# Altium PCB PCB.PcbDoc (part 6 of 11)
Units mm, origin at the board's own origin, x right, y up, seen from the top; angles counter-clockwise.
Board outline 100.46 x 70.51 mm, 10 copper layers (L1(SIG), L2(GND), L3(PWR), L4(SIG), L5(GND), L6(SIG), L7(GND), L8(SIG), L9(GND), L10(SIG)), stack 1.49 mm thick; 425 components, 324 nets, 2004 pads, 1425 vias.
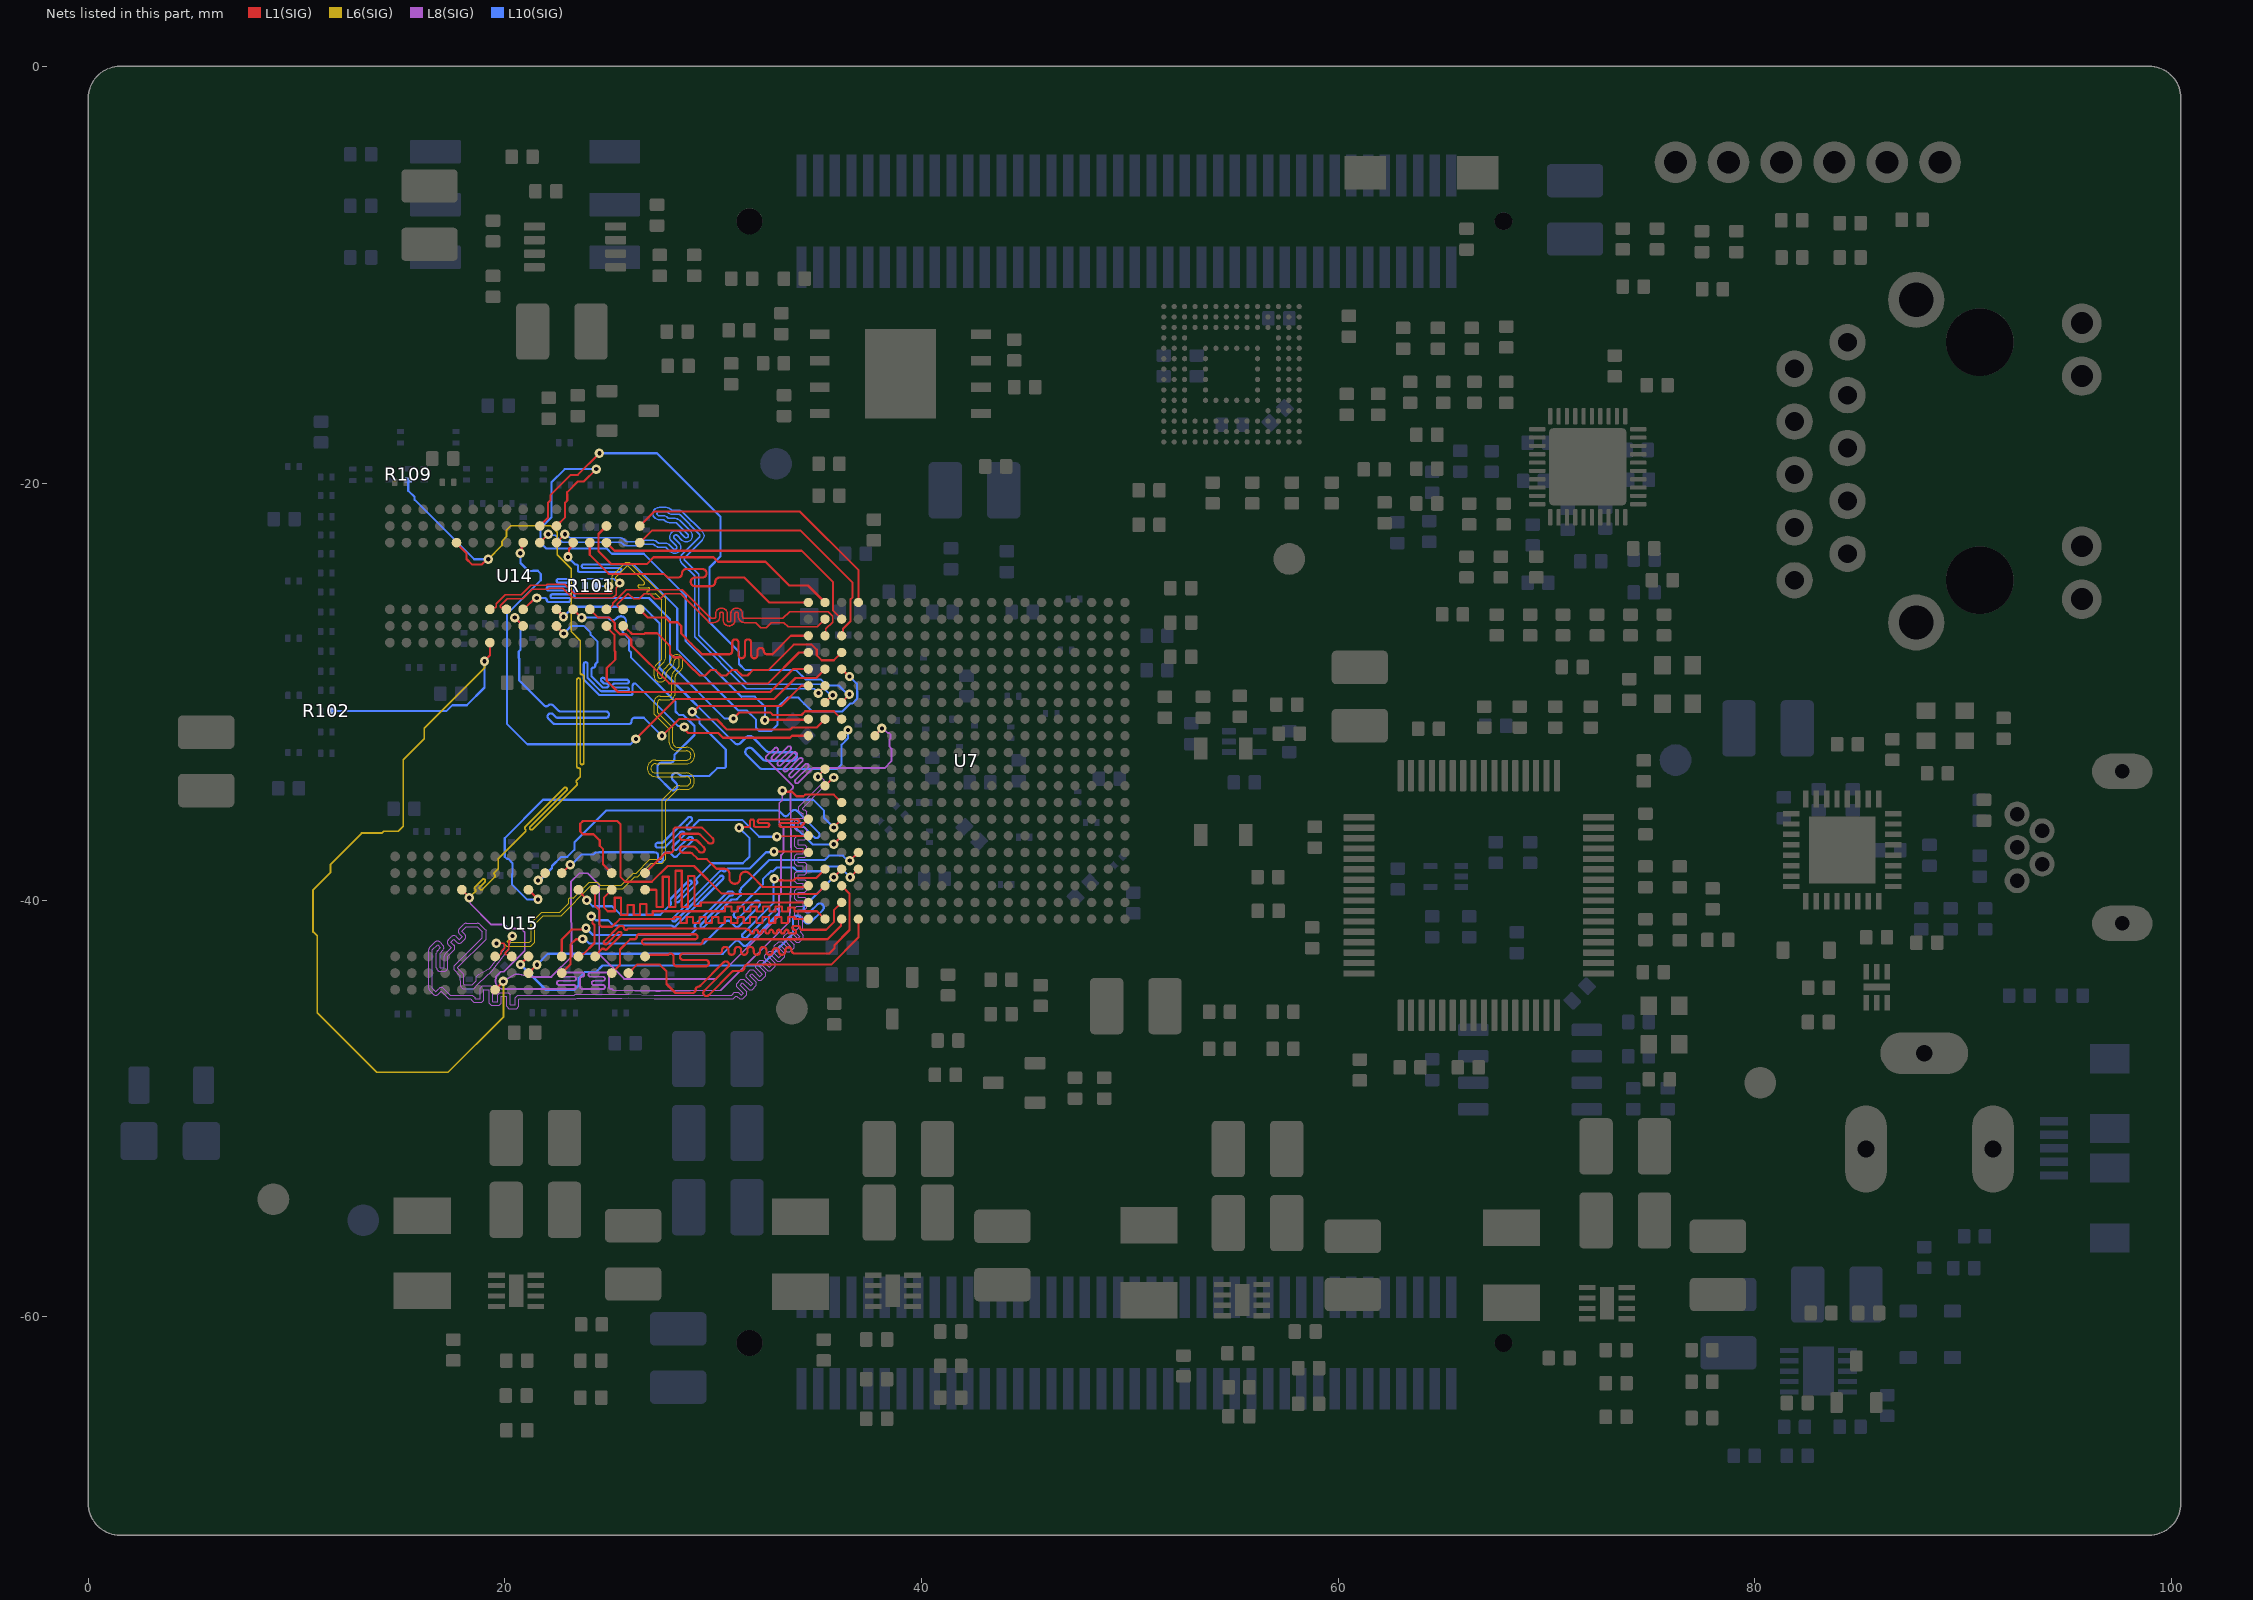
[diagram p13: the nets of this part, all layers, seen from the top]

## Via types
v1: diameter 0.45, hole 0.2, L1(SIG) to L10(SIG), tented both sides, 1194 vias
v2: diameter 0.45, hole 0.2, L1(SIG) to L10(SIG), 211 vias
v3: diameter 0.6, hole 0.25, L1(SIG) to L10(SIG), 9 vias
v4: diameter 0, hole 0.2, L1(SIG) to L10(SIG), tented both sides, 6 vias
v5: diameter 5, hole 3.2, L1(SIG) to L10(SIG), tented both sides, 4 vias
v6: diameter 0.45/0.45/0.45/0.45/0.45/0.45/0.45/0.45/0.45/0.45 (per signal layer), hole 0.2, L1(SIG) to L10(SIG), tented both sides, 1 vias

## Nets (pads, with @x,y where several pads share a name; then routed paths per layer and width w, separated by ;. In a path a pad name is that pad's centre, name@x,y a point inside that pad or via, vN(x,y) a via of type N, cw(c..) or ccw(c..) an arc to the next point about the centre after c; other vN are vias at no path point) (continued)
DDR_BA2: R109.1 U7.J5 U14.M3 U15.M3 | length 106.5
  L1(SIG) w0.103: U14.M3@17.679,-22.839 17.679,-22.873 18.16,-23.354 18.16,-23.625 18.415,-23.88 18.905,-23.88 19.147,-23.637 v1(19.2,-23.637) ; U15.M3@17.933,-39.501 17.933,-39.514 18.288,-39.869 v1(18.288,-39.882) ; U7.J5@37.77,-32.11 37.77,-32.098 38.101,-31.767 v1(38.101,-31.755)
  L6(SIG) w0.088: v1(18.288,-39.882) 18.542,-39.628 18.573,-39.597 ccw(c18.514,-39.537) 18.573,-39.478 cw(c18.632,-39.419) 18.573,-39.36 18.92,-39.013 cw(c18.979,-39.072) 19.038,-39.013 cw(c18.979,-39.072) 19.038,-39.131 18.81,-39.36 ccw(c18.869,-39.419) 18.81,-39.478 ccw(c18.869,-39.419) 18.928,-39.478 19.504,-38.903 ccw(c19.445,-38.844) 19.504,-38.784 cw(c19.563,-38.725) 19.504,-38.666 19.535,-38.635 19.681,-38.488 19.681,-38.015 20.949,-36.748 20.98,-36.717 ccw(c20.92,-36.657) 20.98,-36.598 cw(c21.039,-36.539) 20.979,-36.48 22.846,-34.613 cw(c22.905,-34.672) 22.965,-34.613 cw(c22.905,-34.672) 22.965,-34.732 21.217,-36.48 ccw(c21.276,-36.539) 21.217,-36.598 ccw(c21.276,-36.539) 21.335,-36.598 23.452,-34.482 ccw(c23.392,-34.423) 23.451,-34.363 cw(c23.511,-34.304) 23.451,-34.245 23.482,-34.214 23.622,-34.074 23.622,-33.786 23.622,-33.742 ccw(c23.538,-33.742) 23.538,-33.658 cw(c23.538,-33.574) 23.454,-33.574 23.454,-29.426 cw(c23.538,-29.426) 23.538,-29.342 cw(c23.538,-29.426) 23.622,-29.426 23.622,-33.407 ccw(c23.706,-33.407) 23.706,-33.49 ccw(c23.706,-33.407) 23.79,-33.407 23.79,-29.259 ccw(c23.706,-29.259) 23.706,-29.175 cw(c23.706,-29.091) 23.622,-29.091 23.622,-29.047 23.622,-27.537 23.211,-27.127 23.185,-27.101 23.185,-27.028 23.187,-26.393 ; v1(19.2,-23.637) 19.864,-22.973 19.864,-22.767 20.077,-22.554 20.077,-22.242 20.293,-22.026 22.196,-22.026 22.514,-22.344 22.514,-23.42 23.185,-24.092 23.187,-26.392
  L8(SIG) w0.088: v1(18.288,-39.882) 18.337,-39.93 18.337,-40.162 19.352,-41.177 19.994,-41.177 20.174,-41.357 20.788,-41.366 20.813,-41.391 20.955,-41.533 20.955,-42.432 19.947,-43.44 19.81,-43.44 19.595,-43.655 19.572,-43.678 19.569,-43.71 19.557,-43.872 ccw(c19.925,-43.901) 19.925,-44.27 22.352,-44.27 23.317,-44.27 ccw(c23.317,-44.171) 23.417,-44.171 ccw(c23.317,-44.171) 23.317,-44.071 22.596,-44.071 cw(c22.596,-43.972) 22.497,-43.972 cw(c22.596,-43.972) 22.596,-43.873 23.317,-43.873 ccw(c23.317,-43.774) 23.317,-43.675 22.812,-43.675 cw(c22.812,-43.576) 22.812,-43.477 23.714,-43.477 cw(c23.714,-43.576) 23.714,-43.675 ccw(c23.714,-43.774) 23.615,-43.774 23.615,-44.171 ccw(c23.714,-44.171) 23.714,-44.27 24.705,-44.27 ccw(c24.705,-44.171) 24.705,-44.071 24.27,-44.071 cw(c24.27,-43.972) 24.27,-43.873 24.705,-43.873 ccw(c24.705,-43.774) 24.705,-43.675 24.115,-43.675 cw(c24.115,-43.576) 24.016,-43.576 cw(c24.115,-43.576) 24.115,-43.477 24.904,-43.477 cw(c24.904,-43.576) 25.003,-43.576 25.003,-44.171 ccw(c25.102,-44.171) 25.102,-44.27 25.146,-44.27 25.204,-44.328 27.242,-44.354 27.444,-44.354 30.364,-44.328 33.643,-41.049 33.667,-41.025 33.75,-38.716 33.75,-38.399 33.719,-34.811 33.719,-34.738 33.782,-34.675 33.813,-34.643 ccw(c33.743,-34.573) 33.813,-34.503 32.551,-33.241 cw(c32.622,-33.171) 32.551,-33.101 32.947,-32.705 cw(c33.018,-32.775) 33.088,-32.705 cw(c33.018,-32.775) 33.088,-32.845 32.832,-33.101 ccw(c32.902,-33.171) 32.803,-33.171 ccw(c32.902,-33.171) 32.972,-33.242 33.575,-32.638 cw(c33.645,-32.708) 33.715,-32.638 cw(c33.645,-32.708) 33.715,-32.779 33.112,-33.382 ccw(c33.182,-33.452) 33.112,-33.522 ccw(c33.182,-33.452) 33.252,-33.522 33.856,-32.919 cw(c33.926,-32.989) 34.025,-32.989 cw(c33.926,-32.989) 33.996,-33.059 33.392,-33.662 ccw(c33.463,-33.732) 33.463,-33.831 ccw(c33.463,-33.732) 33.533,-33.802 34.136,-33.199 cw(c34.206,-33.269) 34.277,-33.339 33.673,-33.942 ccw(c33.743,-34.013) 33.644,-34.013 ccw(c33.743,-34.013) 33.813,-34.083 34.416,-33.48 cw(c34.486,-33.55) 34.486,-33.451 cw(c34.486,-33.55) 34.556,-33.62 33.953,-34.223 ccw(c34.023,-34.293) 34.093,-34.364 34.767,-33.69 34.798,-33.659 38.227,-33.659 38.558,-33.328 38.558,-32.724 38.469,-32.635 38.469,-32.276 38.52,-32.225 38.52,-32.049 38.448,-31.977 38.385,-31.977 38.163,-31.755 v1(38.101,-31.755)
  L10(SIG) w0.103: R109.1@15.367,-19.837 15.364,-19.84 15.364,-20.345 15.668,-20.65 15.668,-20.777 18.529,-23.637 v1(19.2,-23.637)
DDR_CK_N: R101.1 U7.M2 U14.K7 U15.K7 | length 103.5
  L1(SIG) w0.069: U14.K7@19.279,-26.039 19.356,-25.962 19.539,-25.962 19.581,-25.92 19.581,-25.782 20.023,-25.34 20.78,-25.34 21.246,-24.874 21.993,-24.874 22.043,-24.823 22.864,-24.823 23.338,-25.297 25.106,-25.297 25.147,-25.256 25.147,-25.17 24.983,-25.006 v1(24.983,-24.939) ; U15.K7@19.533,-42.701 19.61,-42.624 19.793,-42.624 19.835,-42.582 19.835,-42.444 19.996,-42.283 19.996,-42.132 19.939,-42.075 v1(19.592,-42.075) ; U7.M2@35.381,-34.51 U7.M2@35.37,-34.51 U7.M2@35.381,-34.51 ; U7.M2@35.381,-34.51 v1@35.777,-34.114 ; U7.M2@35.381,-34.51 v1@35.777,-34.114 ; v1@35.777,-34.114 v1(35.788,-34.114) v1@35.777,-34.114
  L6(SIG) w0.046: v1(19.592,-42.075) 19.953,-42.075 20.08,-42.202 21.246,-42.202 21.431,-42.017 21.431,-41.154 21.84,-40.746 22.702,-40.746 24.132,-39.316 24.373,-39.316 24.508,-39.45 25.66,-39.45 26.241,-38.87 26.389,-38.87 27.039,-38.219 27.561,-38.219 27.732,-38.048 27.732,-37.437 ; v1(24.983,-24.939) 24.983,-24.906 25.155,-24.734 25.155,-24.421 25.8,-23.776 25.981,-23.776 27.714,-25.509 27.714,-27.563 27.714,-28.378 cw(c27.419,-28.378) 27.628,-28.587 27.374,-28.84 ccw(c27.461,-28.927) 27.338,-28.927 27.338,-29.231 ccw(c27.461,-29.231) 27.461,-29.354 ccw(c27.461,-29.231) 27.584,-29.231 27.584,-29.1 cw(c27.879,-29.1) 27.67,-28.892 27.924,-28.638 ccw(c27.837,-28.551) 27.96,-28.551 27.96,-28.518 cw(c28.255,-28.518) 28.255,-28.223 cw(c28.255,-28.518) 28.551,-28.518 28.551,-28.724 cw(c28.255,-28.724) 28.465,-28.933 28.211,-29.187 ccw(c28.298,-29.274) 28.175,-29.274 28.175,-30.083 cw(c27.879,-30.083) 27.879,-30.378 27.461,-30.378 ccw(c27.461,-30.501) 27.338,-30.501 27.338,-30.61 27.338,-31.009 27.573,-31.244 28.061,-31.731 28.061,-32.435 ccw(c28.283,-32.435) 28.283,-32.658 28.715,-32.658 cw(c28.715,-33.054) 29.111,-33.054 cw(c28.715,-33.054) 28.715,-33.449 27.234,-33.449 ccw(c27.234,-33.672) 27.011,-33.672 ccw(c27.234,-33.672) 27.234,-33.895 28.705,-33.895 cw(c28.705,-34.29) 29.101,-34.29 cw(c28.705,-34.29) 28.705,-34.686 28.386,-34.686 ccw(c28.386,-34.909) 28.229,-34.751 27.732,-35.248 27.732,-37.437 ; 27.732,-36.961 27.732,-37.437
  L8(SIG) w0.047: v1(19.592,-42.075) 19.872,-42.075 19.952,-42.075 19.979,-42.102 19.979,-42.326 19.313,-43.225 19.293,-43.248 cw(c19.125,-43.101) 19.23,-43.297 18.751,-43.554 18.747,-43.559 18.622,-43.683 18.622,-43.874 18.424,-44.073 18.061,-44.073 18.034,-44.045 18.034,-43.565 17.983,-43.514 17.736,-43.266 17.736,-43.228 19.097,-41.867 19.097,-41.452 19.015,-41.371 18.963,-41.318 18.936,-41.291 18.8,-41.155 ccw(c18.678,-41.279) 18.678,-41.105 18.152,-41.105 ccw(c18.152,-41.279) 18.03,-41.156 17.814,-41.372 ccw(c17.937,-41.494) 17.814,-41.616 17.953,-41.756 17.814,-41.895 17.676,-41.757 ccw(c17.552,-41.879) 17.43,-41.756 17.29,-41.895 ccw(c17.413,-42.018) 17.29,-42.14 17.43,-42.279 17.138,-42.571 ccw(c17.261,-42.693) 17.088,-42.693 17.088,-43.239 16.891,-43.239 16.891,-42.54 17.054,-42.377 17.054,-42.37 ccw(c16.906,-42.279) 17.029,-42.157 16.89,-42.018 ccw(c16.767,-42.14) 16.644,-42.018 16.398,-42.264 ccw(c16.521,-42.387) 16.347,-42.387 16.347,-44.226 ccw(c16.521,-44.226) 16.398,-44.348 16.561,-44.511 ccw(c16.683,-44.388) 16.805,-44.511 16.944,-44.372 17.022,-44.449 17.307,-44.734 18.164,-44.734 18.372,-44.734 18.399,-44.761 18.399,-44.802 18.501,-44.904 18.892,-44.904 18.993,-44.802 18.993,-44.29 19.24,-44.29 19.24,-44.945 19.341,-45.047 19.732,-45.047 19.833,-44.945 19.833,-44.611 20.08,-44.611 20.08,-45.101 20.182,-45.203 20.572,-45.203 20.674,-45.101 20.674,-44.761 20.701,-44.734 20.775,-44.734 21.035,-44.734 23.413,-44.733 23.447,-44.699 25.603,-44.699 ccw(c25.603,-44.479) 25.607,-44.699 25.94,-44.694 cw(c25.943,-44.917) 25.952,-44.694 27.166,-44.741 ccw(c27.172,-44.568) 27.172,-44.741 27.585,-44.741 27.593,-44.734 30.961,-44.734 31.033,-44.663 31.092,-44.604 31.13,-44.604 31.271,-44.745 31.415,-44.745 31.62,-44.54 31.62,-44.396 31.303,-44.079 31.407,-43.975 31.724,-44.292 31.867,-44.292 32.073,-44.087 32.073,-43.943 31.756,-43.626 31.86,-43.523 32.176,-43.839 32.32,-43.839 32.525,-43.634 32.525,-43.49 32.209,-43.173 32.312,-43.07 32.629,-43.387 32.773,-43.387 32.978,-43.181 32.978,-43.038 32.661,-42.721 32.765,-42.617 33.082,-42.934 33.226,-42.934 33.431,-42.729 33.431,-42.585 33.114,-42.268 33.218,-42.164 33.535,-42.481 33.678,-42.481 33.884,-42.276 33.884,-42.132 33.567,-41.815 33.67,-41.712 33.987,-42.028 34.131,-42.028 34.336,-41.823 34.336,-41.679 34.196,-41.539 34.196,-41.5 34.248,-41.448 34.29,-41.406 34.29,-41.281 34.29,-40.831 34.161,-40.702 34.096,-40.702 34.096,-40.455 34.402,-40.455 34.504,-40.354 34.504,-39.963 34.402,-39.862 34.096,-39.862 34.096,-39.615 34.402,-39.615 34.504,-39.513 34.504,-39.123 34.402,-39.021 34.096,-39.021 34.096,-38.775 34.402,-38.775 34.504,-38.673 34.504,-38.283 34.402,-38.181 34.096,-38.181 34.096,-37.934 34.402,-37.934 34.504,-37.833 34.504,-37.442 34.402,-37.341 34.096,-37.341 34.096,-37.094 34.402,-37.094 34.504,-36.993 34.504,-36.602 34.402,-36.501 34.096,-36.501 34.096,-36.254 34.402,-36.254 34.504,-36.152 34.504,-35.762 34.402,-35.66 34.317,-35.66 34.29,-35.633 34.29,-35.582 35.264,-34.608 35.572,-34.3 ; 35.572,-34.3 35.758,-34.114 v1(35.788,-34.114) 35.755,-34.114 35.572,-34.297 35.572,-34.3
  L10(SIG) w0.069: R101.1@24.511,-25.023 24.511,-24.97 24.551,-24.93 24.974,-24.93 v1(24.983,-24.939)
DDR_CK_P: R101.2 U7.L2 U14.J7 U15.J7 | length 103.3
  L1(SIG) w0.069: U14.J7@20.079,-26.039 20.002,-25.962 19.819,-25.962 19.777,-25.92 19.777,-25.863 20.104,-25.535 20.861,-25.535 21.327,-25.07 22.074,-25.07 22.124,-25.019 22.783,-25.019 23.257,-25.493 25.187,-25.493 25.343,-25.337 25.343,-25.005 25.508,-24.84 v1(25.508,-24.774) ; U15.J7@20.333,-42.701 20.256,-42.624 20.073,-42.624 20.031,-42.582 20.031,-42.525 20.192,-42.364 20.192,-42.001 20.36,-41.832 v1(20.36,-41.729) ; v1(35.027,-34.074) 35.027,-34.063 35.37,-33.72 U7.L2@35.37,-33.71
  L6(SIG) w0.046: v1(20.36,-41.729) 20.124,-41.965 20.124,-42.003 20.151,-42.029 21.174,-42.029 21.259,-41.945 21.259,-41.083 21.768,-40.573 22.63,-40.573 22.991,-40.213 23.063,-40.141 23.063,-39.929 23.114,-39.878 23.264,-39.878 23.295,-39.909 24.061,-39.143 24.445,-39.143 24.579,-39.277 25.589,-39.277 26.169,-38.697 26.317,-38.697 26.968,-38.046 27.49,-38.046 27.559,-37.977 27.559,-37.437 27.559,-35.177 28.107,-34.629 cw(c28.386,-34.909) 28.386,-34.513 28.705,-34.513 ccw(c28.705,-34.29) 28.928,-34.29 ccw(c28.705,-34.29) 28.705,-34.067 27.234,-34.067 cw(c27.234,-33.672) 26.838,-33.672 cw(c27.234,-33.672) 27.234,-33.276 28.715,-33.276 ccw(c28.715,-33.054) 28.938,-33.054 ccw(c28.715,-33.054) 28.715,-32.831 28.283,-32.831 cw(c28.283,-32.435) 27.888,-32.435 27.888,-31.803 27.329,-31.244 27.165,-31.08 27.165,-30.61 27.165,-30.501 cw(c27.461,-30.501) 27.461,-30.205 27.879,-30.205 ccw(c27.879,-30.083) 28.002,-30.083 28.002,-29.274 cw(c28.298,-29.274) 28.089,-29.065 28.342,-28.811 ccw(c28.255,-28.724) 28.378,-28.724 28.378,-28.518 ccw(c28.255,-28.518) 28.255,-28.395 ccw(c28.255,-28.518) 28.133,-28.518 28.133,-28.551 cw(c27.837,-28.551) 28.046,-28.76 27.792,-29.014 ccw(c27.879,-29.1) 27.757,-29.1 27.757,-29.231 cw(c27.461,-29.231) 27.461,-29.527 cw(c27.461,-29.231) 27.165,-29.231 27.165,-28.927 cw(c27.461,-28.927) 27.252,-28.718 27.506,-28.464 ccw(c27.419,-28.378) 27.541,-28.378 27.541,-27.563 27.541,-25.782 27.541,-25.581 27.273,-25.313 ccw(c27.222,-25.364) 27.222,-25.291 26.888,-25.291 cw(c26.888,-25.219) 26.815,-25.219 cw(c26.888,-25.219) 26.888,-25.146 ccw(c26.888,-25.073) 26.961,-25.073 ccw(c26.888,-25.073) 26.888,-25 26.463,-25 cw(c26.463,-24.927) 26.39,-24.927 cw(c26.463,-24.927) 26.463,-24.854 26.639,-24.854 ccw(c26.639,-24.781) 26.69,-24.73 26.61,-24.649 25.91,-23.949 25.872,-23.949 25.328,-24.493 25.328,-24.577 25.508,-24.757 v1(25.508,-24.774)
  L8(SIG) w0.047: 16.906,-42.28 16.768,-42.418 ccw(c16.891,-42.54) 16.717,-42.54 16.717,-43.239 ccw(c16.891,-43.239) 16.891,-43.412 17.088,-43.412 ccw(c17.088,-43.239) 17.261,-43.239 17.261,-42.693 17.553,-42.402 ccw(c17.43,-42.279) 17.552,-42.156 17.413,-42.018 17.552,-41.879 17.692,-42.018 ccw(c17.814,-41.895) 17.936,-42.018 18.076,-41.878 ccw(c17.953,-41.756) 18.075,-41.633 17.937,-41.494 18.152,-41.279 18.678,-41.279 18.84,-41.441 18.892,-41.493 18.923,-41.524 18.923,-41.795 17.562,-43.156 17.562,-43.338 17.796,-43.572 17.823,-43.599 17.86,-44.117 17.989,-44.246 18.495,-44.246 18.732,-44.01 18.758,-43.983 19.395,-43.391 ccw(c19.125,-43.101) 19.416,-43.37 19.42,-43.366 19.443,-43.34 ccw(c19.133,-43.093) 19.452,-43.328 20.153,-42.383 v1(20.36,-41.729) ; 16.906,-42.279 16.767,-42.14 16.521,-42.387 16.521,-44.226 16.683,-44.388 16.822,-44.248 cw(c16.944,-44.372) 17.067,-44.248 ; 17.067,-44.249 17.145,-44.327 17.379,-44.561 18.164,-44.561 18.444,-44.561 18.573,-44.689 18.573,-44.73 18.82,-44.73 18.82,-44.218 18.921,-44.117 19.312,-44.117 19.413,-44.218 19.413,-44.873 19.66,-44.873 19.66,-44.539 19.762,-44.437 20.152,-44.437 20.254,-44.539 20.254,-45.029 20.5,-45.029 20.5,-44.689 20.629,-44.561 20.775,-44.561 20.963,-44.561 21.033,-44.56 23.341,-44.56 23.375,-44.526 25.603,-44.526 25.935,-44.52 cw(c25.943,-44.917) 25.96,-44.52 27.172,-44.568 27.513,-44.568 27.521,-44.561 30.89,-44.561 30.91,-44.54 31.02,-44.43 31.202,-44.43 31.343,-44.571 31.446,-44.468 31.13,-44.151 31.13,-44.007 31.335,-43.802 31.479,-43.802 31.796,-44.119 31.899,-44.015 31.582,-43.698 31.582,-43.554 31.788,-43.349 31.931,-43.349 32.248,-43.666 32.352,-43.562 32.035,-43.245 32.035,-43.102 32.24,-42.896 32.384,-42.896 32.701,-43.213 32.805,-43.109 32.488,-42.793 32.488,-42.649 32.693,-42.443 32.837,-42.443 33.154,-42.76 33.257,-42.657 32.94,-42.34 32.94,-42.196 33.146,-41.991 33.29,-41.991 33.606,-42.308 33.71,-42.204 33.393,-41.887 33.393,-41.743 33.599,-41.538 33.742,-41.538 34.059,-41.855 34.163,-41.751 34.022,-41.61 34.022,-41.428 34.116,-41.334 34.116,-41.316 34.116,-41.281 34.116,-40.903 34.089,-40.875 34.024,-40.875 33.922,-40.774 33.922,-40.383 34.024,-40.282 34.33,-40.282 34.33,-40.035 34.024,-40.035 33.922,-39.933 33.922,-39.543 34.024,-39.441 34.33,-39.441 34.33,-39.195 34.024,-39.195 33.922,-39.093 33.922,-38.703 34.024,-38.601 34.33,-38.601 34.33,-38.355 34.024,-38.355 33.922,-38.253 33.922,-37.863 34.024,-37.761 34.33,-37.761 34.33,-37.514 34.024,-37.514 33.922,-37.413 33.922,-37.022 34.024,-36.921 34.33,-36.921 34.33,-36.674 34.024,-36.674 33.922,-36.572 33.922,-36.182 34.024,-36.08 34.33,-36.08 34.33,-35.834 34.245,-35.834 34.116,-35.705 34.116,-35.51 35.018,-34.608 35.341,-34.285 35.341,-34.247 35.245,-34.151 35.105,-34.151 v1(35.027,-34.074) v1@35.137,-34.074
  L10(SIG) w0.069: R101.2@23.855,-24.896 23.86,-24.891 23.86,-24.658 23.938,-24.58 25.239,-24.58 25.434,-24.774 v1(25.508,-24.774)
DDR_CKE: R102.1 U7.N3 U14.K9 U15.K9 | length 77.1
  L1(SIG) w0.103: v1(19.02,-28.535) 19.02,-28.515 19.279,-28.256 U14.K9@19.279,-27.639 ; U15.K9@19.533,-44.301 19.533,-44.297 19.925,-43.905 v1(19.925,-43.901) ; v1(33.325,-34.74) 33.38,-34.795 33.782,-34.795 34.002,-35.015 34.332,-35.015 34.414,-34.933 35.793,-34.933 U7.N3@36.17,-35.31
  L6(SIG) w0.088: v1(19.02,-28.535) 19.02,-28.862 16.129,-31.754 16.129,-32.262 15.12,-33.27 15.12,-36.444 14.875,-36.69 14.188,-36.69 14.095,-36.783 13.124,-36.783 11.634,-38.273 11.634,-38.661 10.795,-39.501 10.795,-41.522 10.992,-41.719 10.992,-45.413 13.843,-48.264 17.272,-48.264 19.941,-45.595 19.941,-43.917 v1(19.925,-43.901)
  L8(SIG) w0.088: v1(19.925,-43.901) 20.482,-43.556 20.685,-43.556 21.222,-43.658 21.248,-43.684 21.251,-43.687 22.236,-43.687 23.223,-42.701 23.173,-40.527 23.173,-39.121 23.583,-38.711 23.983,-38.711 24.534,-39.263 24.534,-42.588 25.728,-43.781 30.136,-43.781 33.153,-40.764 33.153,-39.795 33.262,-39.686 33.262,-38.773 ; 33.262,-38.773 33.262,-37.84 33.376,-37.725 33.376,-36.555 33.175,-36.355 33.175,-35.338 33.201,-35.312 33.318,-35.195 v1(33.325,-34.74)
  L10(SIG) w0.103: R102.1@11.708,-30.916 17.205,-30.916 17.479,-30.642 18.171,-30.642 19.02,-29.792 v1(19.02,-28.535)
DDR_DM0: U7.A1 U14.D3 | length 14.5
  L1(SIG) w0.103: U14.D3@24.079,-22.839 24.079,-23.423 24.991,-24.336 27.634,-24.336 27.813,-24.515 28.251,-24.515 28.303,-24.515 ccw(c28.303,-24.308) 28.51,-24.308 cw(c28.716,-24.308) 28.716,-24.101 29.48,-24.101 cw(c29.48,-24.308) 29.687,-24.308 cw(c29.48,-24.308) 29.48,-24.515 29.13,-24.515 ccw(c29.13,-24.721) 28.923,-24.721 ccw(c29.13,-24.721) 29.13,-24.928 29.893,-24.928 ccw(c29.893,-24.721) 30.1,-24.721 cw(c30.307,-24.721) 30.307,-24.515 30.358,-24.515 31.496,-24.515 31.526,-24.545 32.691,-25.71 U7.A1@34.57,-25.71
DDR_DM1: U7.F1 U14.E7 | length 27.3
  L1(SIG) w0.103: U14.E7@23.279,-26.039 23.283,-26.039 23.683,-26.439 v1(23.687,-26.439) ; v1(28.995,-30.953) 29.056,-30.953 29.331,-30.677 33.267,-30.677 34.235,-29.71 U7.F1@34.57,-29.71
  L10(SIG) w0.103: v1(23.687,-26.439) 24.955,-26.439 24.962,-26.445 24.998,-26.482 ccw(c25.176,-26.304) 25.354,-26.482 25.393,-26.443 cw(c25.571,-26.621) 25.749,-26.443 cw(c25.571,-26.621) 25.749,-26.799 25.71,-26.838 ccw(c25.888,-27.016) 25.71,-27.194 25.962,-27.446 25.962,-27.889 25.962,-28.01 26.052,-28.099 26.052,-28.341 28.194,-30.484 28.194,-30.944 28.368,-31.118 28.579,-31.118 29.101,-31.639 29.101,-32.07 28.138,-33.033 28.138,-33.151 28.138,-33.202 cw(c27.936,-33.202) 27.936,-33.404 27.533,-33.404 ccw(c27.533,-33.606) 27.331,-33.606 27.331,-33.98 ccw(c27.533,-33.98) 27.39,-34.122 27.932,-34.665 ccw(c28.075,-34.522) 28.218,-34.665 ccw(c28.075,-34.522) 28.218,-34.38 28.073,-34.235 cw(c28.216,-34.093) 28.073,-33.95 cw(c28.216,-34.093) 28.358,-33.95 28.389,-33.981 ccw(c28.532,-33.838) 28.532,-34.04 28.956,-34.04 29.82,-34.04 30.199,-33.661 30.544,-33.661 30.607,-33.598 30.607,-32.77 29.337,-31.5 29.337,-31.295 v1(28.995,-30.953) v1@28.914,-30.953
DDR_DM2: U7.T1 U15.E7 | length 21.4
  L1(SIG) w0.103: U15.E7@23.533,-42.701 23.632,-42.701 23.742,-42.591 23.768,-42.591 24.305,-42.054 24.305,-41.196 24.211,-41.102 24.211,-40.848 v1(24.145,-40.781) ; v1(32.921,-37.672) 32.921,-37.659 33.353,-37.663 ; 33.354,-37.663 34.524,-37.663 U7.T1@34.57,-37.71
  L10(SIG) w0.103: v1(24.145,-40.781) 24.197,-40.781 24.379,-40.963 24.958,-40.963 25.21,-41.216 27.865,-41.216 27.942,-41.216 27.982,-41.216 cw(c27.982,-41.308) 28.047,-41.242 28.064,-41.26 ccw(c28.129,-41.195) 28.194,-41.26 30.47,-38.984 ccw(c30.405,-38.919) 30.47,-38.854 ccw(c30.405,-38.919) 30.34,-38.854 28.194,-41 cw(c28.129,-40.936) 28.064,-41 cw(c28.129,-40.936) 28.064,-40.871 30.34,-38.595 cw(c30.405,-38.66) 30.47,-38.595 ccw(c30.535,-38.53) 30.599,-38.595 ; 30.599,-38.595 30.636,-38.558 30.71,-38.484 31.756,-38.484 32.541,-37.7 32.893,-37.7 v1(32.921,-37.672)
DDR_DM3: U7.Y1 U15.D3 | length 17.5
  L1(SIG) w0.103: U15.D3@24.333,-39.501 24.333,-40.281 24.549,-40.498 24.549,-41.19 24.638,-41.279 25.146,-41.279 25.515,-40.91 28.077,-40.91 28.129,-40.91 28.129,-40.804 28.432,-40.804 28.432,-41.1 28.736,-41.1 28.736,-40.804 29.039,-40.804 29.039,-41.1 29.342,-41.1 29.342,-40.804 29.646,-40.804 29.646,-41.1 29.949,-41.1 29.949,-40.804 30.253,-40.804 30.253,-41.1 30.556,-41.1 30.556,-40.804 30.86,-40.804 30.86,-41.1 31.163,-41.1 31.163,-40.804 31.466,-40.804 31.466,-41.1 31.77,-41.1 31.77,-40.804 32.073,-40.804 32.073,-41.1 32.377,-41.1 32.377,-40.804 32.68,-40.804 32.68,-41.1 32.983,-41.1 32.983,-40.804 33.287,-40.804 33.287,-41.1 33.59,-41.1 33.59,-40.804 33.894,-40.804 33.894,-40.91 34.292,-40.91 U7.Y1@34.57,-40.91
DDR_DQ0: U7.C3 U14.A3 | length 14.3
  L1(SIG) w0.103: U14.A3@26.479,-22.839 27.071,-22.246 34.181,-22.246 36.695,-24.76 36.695,-25.452 36.593,-25.554 36.593,-26.619 36.236,-26.976 36.236,-27.243 U7.C3@36.17,-27.31
DDR_DQ1: U7.B3 U14.C3 | length 13.6
  L1(SIG) w0.103: U14.C3@24.879,-22.839 25.265,-23.224 25.518,-23.224 25.519,-23.225 34.249,-23.225 35.747,-24.723 35.747,-26.086 U7.B3@36.17,-26.51
DDR_DQ2: U7.A2 U14.C2 | length 13.5
  L1(SIG) w0.103: U14.C2@24.879,-22.039 24.492,-22.425 24.492,-23.243 25.117,-23.868 26.809,-23.868 27.137,-23.54 30.013,-23.54 30.226,-23.753 32.512,-23.753 33.655,-24.896 34.556,-24.896 U7.A2@35.37,-25.71
DDR_DQ3: U7.A4 U14.A2 | length 13.5
  L1(SIG) w0.103: U14.A2@26.479,-22.039 27.178,-21.34 34.163,-21.34 36.97,-24.147 U7.A4@36.97,-25.71
DDR_DQ4: U7.D3 U14.B8 | length 13.4
  L1(SIG) w0.103: U14.B8@25.679,-26.839 25.713,-26.839 25.923,-27.048 26.1,-27.225 26.685,-27.225 26.724,-27.186 27.309,-27.186 27.887,-27.764 27.924,-27.801 27.924,-28.16 28.104,-28.339 28.463,-28.339 29.083,-28.96 29.108,-28.96 29.362,-29.214 29.616,-29.214 29.87,-28.96 30.124,-28.96 30.378,-29.214 30.632,-29.214 30.886,-28.96 31.14,-28.96 31.394,-29.214 31.648,-29.214 31.902,-28.96 32.639,-28.96 33.866,-27.733 34.726,-27.733 34.97,-27.977 34.97,-28.242 35.214,-28.486 35.793,-28.486 U7.D3@36.17,-28.11
DDR_DQ5: U7.D1 U14.D7 | length 12.9
  L1(SIG) w0.103: U14.D7@24.079,-26.039 24.466,-26.425 25.013,-26.425 25.279,-26.692 25.279,-26.985 25.525,-27.232 25.819,-27.232 26.026,-27.439 26.069,-27.482 26.069,-27.776 27.888,-29.595 32.639,-29.595 34.124,-28.11 U7.D1@34.57,-28.11
DDR_DQ6: U7.C1 U14.A7 | length 13
  L1(SIG) w0.103: U14.A7@26.479,-26.039 26.491,-26.05 26.491,-26.065 26.858,-26.432 27.699,-26.432 27.892,-26.625 27.928,-26.662 28.287,-26.662 28.467,-26.841 28.467,-27.201 28.956,-27.69 29.464,-28.198 30.71,-28.197 30.762,-28.197 ccw(c30.762,-28.046) 30.914,-28.046 30.914,-27.632 cw(c31.066,-27.632) 31.066,-27.481 cw(c31.066,-27.632) 31.217,-27.632 31.217,-28.234 ccw(c31.369,-28.234) 31.369,-28.386 ccw(c31.369,-28.234) 31.521,-28.234 31.521,-27.632 cw(c31.672,-27.632) 31.672,-27.481 cw(c31.672,-27.632) 31.824,-27.632 31.824,-28.234 ccw(c31.976,-28.234) 31.976,-28.386 ccw(c31.976,-28.234) 32.128,-28.234 32.128,-28.039 cw(c32.279,-28.039) 32.279,-27.888 cw(c32.279,-28.039) 32.431,-28.039 32.431,-28.046 ccw(c32.583,-28.046) 32.583,-28.197 32.82,-28.197 32.842,-28.197 32.872,-28.167 33.73,-27.31 U7.C1@34.57,-27.31
DDR_DQ7: U7.E1 U14.C8 | length 13.3
  L1(SIG) w0.103: U14.C8@24.879,-26.839 24.879,-26.873 25.258,-27.253 25.258,-27.471 25.266,-27.478 25.266,-28.029 25.298,-28.062 25.298,-28.452 24.892,-28.858 24.892,-29.468 25.43,-30.006 32.736,-30.006 33.832,-28.91 U7.E1@34.57,-28.91
DDR_DQ8: U7.E2 U14.H3 | length 27.3
  L1(SIG) w0.103: v1(20.74,-23.348) 20.74,-23.254 20.809,-23.185 20.809,-22.909 U14.H3@20.879,-22.839 ; v1(26.289,-32.262) 28.208,-30.343 32.94,-30.343 33.95,-29.333 34.947,-29.333 U7.E2@35.37,-28.91
  L10(SIG) w0.103: v1(20.74,-23.348) 20.754,-23.362 20.754,-23.814 21.137,-24.198 21.354,-24.198 21.362,-24.189 21.579,-24.189 21.727,-24.337 21.727,-24.645 20.098,-26.273 20.098,-31.532 21.082,-32.516 26.035,-32.516 v1(26.289,-32.262)
DDR_DQ9: U7.E3 U14.E3 | length 27.3
  L1(SIG) w0.103: v1(23.034,-23.521) 23.076,-23.478 23.076,-23.14 23.279,-22.938 U14.E3@23.279,-22.839 ; U7.E3@36.17,-28.91 36.183,-28.91 36.536,-29.263 v1(36.548,-29.263)
  L10(SIG) w0.103: v1(23.034,-23.521) 23.034,-23.549 23.365,-23.88 23.417,-23.88 cw(c23.417,-23.971) 23.508,-23.971 23.508,-24.155 ccw(c23.6,-24.155) 23.6,-24.246 25.508,-24.246 ccw(c25.508,-24.155) 25.599,-24.155 ccw(c25.508,-24.155) 25.508,-24.063 23.784,-24.063 cw(c23.784,-23.971) 23.692,-23.971 cw(c23.784,-23.971) 23.784,-23.88 25.651,-23.88 26.162,-23.88 28.273,-25.991 28.273,-27.954 31.212,-30.893 31.613,-30.893 32.065,-31.345 32.065,-31.733 32.213,-31.881 32.785,-31.881 33.093,-31.573 33.093,-30.754 33.582,-30.265 34.071,-30.265 34.133,-30.326 34.138,-30.326 34.376,-30.564 34.376,-30.57 34.752,-30.946 36.195,-30.946 36.573,-30.568 36.678,-30.568 36.898,-30.347 36.898,-30.291 36.916,-30.273 36.916,-29.961 36.898,-29.944 36.898,-29.612 v1(36.548,-29.263)
DDR_DQ10: U7.G3 U14.G2 | length 26.3
  L1(SIG) w0.103: U14.G2@21.679,-22.039 22.066,-21.652 22.066,-20.936 22.186,-20.815 22.186,-20.557 23.159,-19.585 23.502,-19.585 v1(24.541,-18.546) ; U7.G3@36.17,-30.51 36.17,-30.498 36.539,-30.129 v1(36.539,-30.117)
  L10(SIG) w0.103: v1(24.541,-18.546) 27.305,-18.546 30.353,-21.594 30.353,-23.499 29.824,-24.028 29.824,-26.652 31.242,-28.071 31.242,-28.667 31.535,-28.96 33.985,-28.96 34.429,-29.403 35.162,-29.403 35.447,-29.689 36.019,-29.689 36.448,-30.117 v1(36.539,-30.117)
DDR_DQ11: U7.H3 U14.H7 | length 26.7
  L1(SIG) w0.103: U14.H7@20.879,-26.039 20.912,-26.039 21.453,-25.498 v1(21.534,-25.498) ; v1(30.969,-31.285) 31.268,-30.986 32.739,-30.986 32.861,-31.109 34.238,-31.109 34.414,-30.933 35.793,-30.933 U7.H3@36.17,-31.31
  L10(SIG) w0.103: v1(21.534,-25.498) 21.866,-25.498 21.917,-25.498 cw(c21.917,-25.589) 22.009,-25.589 ccw(c22.101,-25.589) 22.101,-25.681 23.06,-25.681 ccw(c23.06,-25.589) 23.152,-25.589 ccw(c23.06,-25.589) 23.06,-25.498 22.284,-25.498 cw(c22.284,-25.406) 22.192,-25.406 cw(c22.284,-25.406) 22.284,-25.314 23.06,-25.314 ccw(c23.06,-25.223) 23.152,-25.223 ccw(c23.06,-25.223) 23.06,-25.131 22.101,-25.131 cw(c22.101,-25.039) 22.009,-25.039 cw(c22.101,-25.039) 22.101,-24.947 23.06,-24.947 ccw(c23.06,-24.856) 23.152,-24.856 ccw(c23.06,-24.856) 23.06,-24.764 22.58,-24.764 cw(c22.58,-24.672) 22.489,-24.672 cw(c22.58,-24.672) 22.58,-24.581 23.243,-24.581 cw(c23.243,-24.672) 23.335,-24.672 23.335,-25.406 ccw(c23.427,-25.406) 23.427,-25.498 23.479,-25.498 26.92,-25.498 27.93,-26.508 27.93,-28.658 30.557,-31.285 v1(30.969,-31.285)
DDR_DQ12: U7.J3 U14.F7 | length 26.7
  L1(SIG) w0.103: U14.F7@22.479,-26.039 22.479,-26.046 22.818,-26.385 v1(22.818,-26.393) ; U7.J3@36.17,-32.11 36.181,-32.11 36.462,-31.829 v1(36.473,-31.829)
  L10(SIG) w0.103: v1(22.818,-26.393) 23.299,-25.912 26.638,-25.912 27.428,-26.702 27.428,-28.852 30.995,-32.42 31.032,-32.456 31.033,-32.458 ccw(c31.174,-32.314) 31.316,-32.457 31.603,-32.171 cw(c31.745,-32.314) 31.887,-32.171 32.561,-32.845 ccw(c32.703,-32.702) 32.703,-32.903 33.812,-32.903 cw(c33.812,-33.105) 34.014,-33.105 cw(c33.812,-33.105) 33.812,-33.307 32.536,-33.307 cw(c32.536,-33.105) 32.394,-33.248 31.887,-32.742 ccw(c31.745,-32.884) 31.602,-32.742 ccw(c31.745,-32.884) 31.602,-33.027 32.227,-33.652 ccw(c32.369,-33.509) 32.369,-33.71 34.619,-33.71 34.671,-33.71 35.927,-33.71 36.167,-33.471 36.167,-32.534 36.473,-32.228 v1(36.473,-31.829)
DDR_DQ13: U7.H2 U14.H8 | length 26.8
  L1(SIG) w0.103: v1(20.475,-26.435) U14.H8@20.879,-26.839 ; v1(27.54,-32.111) 27.563,-32.111 28.364,-31.31 28.819,-31.31 28.839,-31.329 30.183,-31.329 30.666,-31.812 33.688,-31.812 33.782,-31.718 34.961,-31.718 U7.H2@35.37,-31.31
  L10(SIG) w0.103: v1(20.475,-26.435) 20.752,-26.711 20.752,-27.973 20.666,-28.059 20.666,-28.371 20.691,-28.396 20.691,-29.457 21.844,-30.611 21.881,-30.647 ; 21.881,-30.648 ccw(c21.988,-30.54) 21.988,-30.692 ccw(c21.988,-30.54) 22.096,-30.647 cw(c22.202,-30.754) 22.31,-30.647 22.561,-30.898 ccw(c22.668,-30.79) 22.668,-30.942 24.847,-30.942 cw(c24.847,-31.094) 24.999,-31.094 cw(c24.847,-31.094) 24.847,-31.246 22.542,-31.246 cw(c22.542,-31.094) 22.435,-31.202 22.31,-31.076 ccw(c22.202,-31.184) 22.095,-31.076 ccw(c22.202,-31.184) 22.095,-31.291 22.309,-31.505 ccw(c22.416,-31.397) 22.416,-31.549 25.934,-31.549 ccw(c25.934,-31.397) 26.086,-31.397 cw(c26.237,-31.397) 26.237,-31.246 26.289,-31.246 26.675,-31.246 v1(27.54,-32.111)
DDR_DQ14: U7.H1 U14.F2 | length 27.3
  L1(SIG) w0.103: U14.F2@22.479,-22.039 22.892,-21.625 22.892,-20.917 22.994,-20.815 22.994,-20.503 22.992,-20.501 22.992,-20.416 23.512,-19.896 23.796,-19.896 v1(24.384,-19.308) ; v1(32.485,-31.363) 32.512,-31.336 34.543,-31.336 U7.H1@34.57,-31.31
  L10(SIG) w0.103: v1(24.384,-19.308) 22.872,-19.308 22.24,-19.939 22.24,-21.617 21.717,-22.14 21.717,-22.268 21.706,-22.279 21.706,-22.591 21.717,-22.601 21.717,-22.855 21.982,-23.121 24.888,-23.121 25.139,-23.372 26.67,-23.372 28.688,-25.39 28.688,-27.566 31.36,-30.238 31.369,-30.23 32.004,-30.23 32.485,-30.711 v1(32.485,-31.363)
DDR_DQ15: U7.J1 U14.F8 | length 26
  L1(SIG) w0.103: U14.F8@22.479,-26.839 22.479,-26.845 22.831,-27.197 v1(22.831,-27.203) ; v1(28.615,-31.686) 28.615,-31.78 28.817,-31.982 30.254,-31.982 30.474,-32.202 33.691,-32.202 33.782,-32.111 U7.J1@34.568,-32.111
  L10(SIG) w0.103: v1(22.831,-27.203) 23.201,-26.833 23.795,-26.833 24.119,-27.157 24.119,-27.265 24.454,-27.6 24.454,-28.191 24.454,-28.524 cw(c24.362,-28.524) 24.427,-28.588 24.365,-28.651 ccw(c24.43,-28.715) 24.338,-28.715 24.338,-28.745 cw(c24.247,-28.745) 24.247,-28.837 ccw(c24.247,-28.929) 24.155,-28.929 24.155,-29.215 ccw(c24.247,-29.215) 24.182,-29.28 24.663,-29.761 ccw(c24.728,-29.696) 24.728,-29.788 24.886,-29.788 ccw(c24.886,-29.696) 24.978,-29.696 ccw(c24.886,-29.696) 24.886,-29.604 24.804,-29.604 cw(c24.804,-29.513) 24.739,-29.578 24.641,-29.48 cw(c24.707,-29.416) 24.642,-29.351 cw(c24.707,-29.416) 24.772,-29.351 24.815,-29.394 ccw(c24.88,-29.329) 24.88,-29.421 25.861,-29.421 cw(c25.861,-29.513) 25.953,-29.513 cw(c25.861,-29.513) 25.861,-29.604 25.253,-29.604 ccw(c25.253,-29.696) 25.161,-29.696 ccw(c25.253,-29.696) 25.253,-29.788 25.861,-29.788 cw(c25.861,-29.88) 25.953,-29.88 cw(c25.861,-29.88) 25.861,-29.971 24.652,-29.971 cw(c24.652,-29.88) 24.587,-29.945 23.998,-29.356 cw(c24.063,-29.291) 23.971,-29.291 23.971,-28.671 ccw(c23.88,-28.671) 23.88,-28.579 ccw(c23.88,-28.671) 23.788,-28.671 23.788,-29.367 ccw(c23.88,-29.367) 23.815,-29.432 24.511,-30.128 ccw(c24.576,-30.063) 24.576,-30.155 26.044,-30.155 ccw(c26.044,-30.063) 26.136,-30.063 26.136,-29.696 cw(c26.228,-29.696) 26.228,-29.604 26.279,-29.604 28.323,-31.648 28.577,-31.648 v1(28.615,-31.686)
DDR_DQ16: U7.P1 U15.E3 | length 21.9
  L1(SIG) w0.103: U15.E3@23.533,-39.501 23.533,-39.554 23.933,-39.954 v1(23.933,-40.007) ; v1(31.244,-36.522) 31.279,-36.487 31.632,-36.487 31.684,-36.487 ccw(c31.684,-36.395) 31.775,-36.395 31.775,-36.212 cw(c31.867,-36.212) 31.867,-36.12 cw(c31.867,-36.212) 31.959,-36.212 31.959,-36.395 ccw(c32.051,-36.395) 32.051,-36.487 32.601,-36.487 ccw(c32.601,-36.395) 32.693,-36.395 ccw(c32.601,-36.395) 32.601,-36.304 32.234,-36.304 cw(c32.234,-36.212) 32.142,-36.212 cw(c32.234,-36.212) 32.234,-36.12 34.049,-36.12 cw(c34.049,-36.212) 34.141,-36.212 cw(c34.049,-36.212) 34.049,-36.304 33.274,-36.304 ccw(c33.274,-36.395) 33.183,-36.395 ccw(c33.274,-36.395) 33.274,-36.487 34.192,-36.487 U7.P1@34.57,-36.11
  L10(SIG) w0.103: v1(23.933,-40.007) 24.216,-40.29 25.146,-40.29 25.558,-40.703 27.46,-40.703 27.92,-40.243 27.957,-40.206 ccw(c27.892,-40.141) 27.956,-40.076 cw(c28.021,-40.011) 27.956,-39.947 28.818,-39.085 cw(c28.883,-39.149) 28.948,-39.085 cw(c28.883,-39.149) 28.948,-39.214 28.216,-39.947 ccw(c28.281,-40.011) 28.216,-40.076 ccw(c28.281,-40.011) 28.346,-40.076 29.208,-39.214 ccw(c29.143,-39.149) 29.207,-39.084 cw(c29.272,-39.02) 29.207,-38.955 29.244,-38.918 29.932,-38.231 31.422,-38.231 31.75,-37.903 31.75,-37.027 v1(31.244,-36.522)
DDR_DQ17: U7.P3 U15.H3 | length 22.5
  L1(SIG) w0.103: U15.H3@21.133,-39.501 21.133,-39.504 21.59,-39.961 v1(21.59,-39.965) ; v1(35.786,-36.516) 35.786,-36.505 36.17,-36.121 U7.P3@36.17,-36.11
  L10(SIG) w0.103: v1(21.59,-39.965) 21.057,-39.965 20.348,-39.257 20.348,-38.752 20.37,-38.73 20.37,-38.225 20.165,-38.02 20.1,-38.02 19.993,-37.913 19.993,-37.024 21.835,-35.183 34.798,-35.183 35.329,-35.714 35.329,-36.059 v1(35.786,-36.516)
DDR_DQ18: U7.R3 U15.G2 | length 21.4
  L1(SIG) w0.103: v1(21.596,-39.053) 21.596,-39.045 21.933,-38.709 U15.G2@21.933,-38.701 ; v1(35.786,-37.316) 35.786,-37.305 36.17,-36.921 U7.R3@36.17,-36.91
  L10(SIG) w0.103: v1(21.596,-39.053) 21.668,-39.053 22.263,-38.457 22.263,-38.361 22.7,-37.924 22.997,-37.924 23.339,-37.581 23.339,-37.23 24.878,-35.691 33.137,-35.691 33.336,-35.89 33.373,-35.926 33.374,-35.927 ccw(c33.48,-35.819) 33.587,-35.927 33.803,-35.711 cw(c33.909,-35.819) 34.016,-35.711 35.064,-36.759 cw(c34.957,-36.866) 35.064,-36.974 cw(c34.957,-36.866) 34.849,-36.974 34.017,-36.141 ccw(c33.909,-36.248) 33.802,-36.141 ccw(c33.909,-36.248) 33.802,-36.356 34.742,-37.296 34.779,-37.332 35.77,-37.332 v1(35.786,-37.316)
DDR_DQ19: U7.R1 U15.F2 | length 21.3
  L1(SIG) w0.103: U15.F2@22.733,-38.701 22.737,-38.701 23.137,-38.301 v1(23.141,-38.301) ; v1(33.059,-36.952) U7.R1@34.57,-36.91
  L10(SIG) w0.103: v1(23.141,-38.301) 23.2,-38.301 23.698,-37.803 24.263,-37.803 24.354,-37.712 24.51,-37.712 24.524,-37.699 27.164,-37.699 27.178,-37.712 27.23,-37.712 cw(c27.23,-37.829) 27.346,-37.829 27.346,-38.062 ccw(c27.463,-38.062) 27.58,-38.062 27.58,-37.829 cw(c27.697,-37.829) 27.697,-37.712 27.73,-37.712 ccw(c27.73,-37.596) 27.756,-37.709 27.817,-37.695 cw(c27.844,-37.808) 27.926,-37.726 28.093,-37.892 ccw(c28.176,-37.81) 28.258,-37.893 28.99,-37.161 ccw(c28.907,-37.078) 28.99,-36.996 ccw(c28.907,-37.078) 28.824,-36.996 28.258,-37.562 cw(c28.176,-37.48) 28.093,-37.562 cw(c28.176,-37.48) 28.093,-37.397 28.589,-36.902 ccw(c28.506,-36.82) 28.424,-36.736 27.716,-37.444 cw(c27.633,-37.362) 27.633,-37.479 27.346,-37.479 cw(c27.346,-37.362) 27.23,-37.362 cw(c27.346,-37.362) 27.346,-37.245 27.536,-37.245 ccw(c27.536,-37.129) 27.618,-37.212 28.791,-36.039 cw(c28.874,-36.122) 28.99,-36.122 cw(c28.874,-36.122) 28.956,-36.204 28.753,-36.407 ccw(c28.836,-36.489) 28.918,-36.572 29.225,-36.266 29.345,-36.145 31.4,-36.145 32.209,-36.953 33.057,-36.953 v1(33.059,-36.952)
DDR_DQ20: U7.T4 U15.F7 | length 22.3
  L1(SIG) w0.103: U15.F7@22.733,-42.701 22.733,-41.89 23.222,-41.401 23.835,-41.401 v1(23.895,-41.34) ; v1(36.554,-38.104) 36.565,-38.104 36.959,-37.71 U7.T4@36.97,-37.71
  L10(SIG) w0.103: v1(23.895,-41.34) 24.23,-41.675 28.905,-41.675 29.103,-41.477 29.139,-41.44 ccw(c29.071,-41.372) 29.139,-41.303 cw(c29.208,-41.235) 29.139,-41.167 30.699,-39.608 cw(c30.767,-39.676) 30.767,-39.58 30.87,-39.58 cw(c30.87,-39.676) 30.966,-39.676 cw(c30.87,-39.676) 30.87,-39.773 30.847,-39.773 ccw(c30.847,-39.87) 30.779,-39.801 29.413,-41.167 ccw(c29.481,-41.235) 29.413,-41.304 ccw(c29.481,-41.235) 29.55,-41.304 30.859,-39.994 cw(c30.927,-40.063) 30.927,-39.966 31.086,-39.966 ccw(c31.086,-39.87) 31.154,-39.938 31.308,-39.785 ccw(c31.239,-39.717) 31.307,-39.649 cw(c31.376,-39.58) 31.307,-39.512 31.344,-39.475 31.344,-39.418 32.687,-38.076 35.365,-38.076 35.576,-37.864 36.223,-37.864 36.463,-38.104 v1(36.554,-38.104)
DDR_DQ21: U7.U4 U15.F8 | length 21.3
  L1(SIG) w0.103: U15.F8@22.733,-43.501 23.146,-43.087 23.146,-42.143 23.412,-41.877 23.72,-41.877 v1(23.731,-41.865) ; v1(36.576,-38.904) U7.U4@36.97,-38.51
  L10(SIG) w0.103: v1(23.731,-41.865) 23.825,-41.865 24.045,-42.085 29.547,-42.085 30.565,-41.066 30.602,-41.03 cw(c30.709,-41.137) 30.817,-41.03 31.031,-41.244 ccw(c31.138,-41.137) 31.245,-41.245 32.207,-40.283 ccw(c32.099,-40.176) 32.207,-40.069 ccw(c32.099,-40.176) 31.992,-40.069 31.246,-40.815 cw(c31.138,-40.708) 31.031,-40.815 cw(c31.138,-40.708) 31.031,-40.601 31.885,-39.747 31.921,-39.71 32.385,-39.247 32.385,-39.003 32.779,-38.609 32.87,-38.609 33.049,-38.431 33.855,-38.431 34.036,-38.612 35.179,-38.612 35.407,-38.384 36.056,-38.384 v1(36.576,-38.904)
DDR_DQ22: U7.U2 U15.H8 | length 22
  L1(SIG) w0.103: U15.H8@21.133,-43.501 21.137,-43.501 21.537,-43.101 v1(21.541,-43.101) ; v1(32.942,-38.979) 33.008,-39.046 33.359,-39.046 33.373,-39.059 33.856,-39.059 33.982,-38.933 34.947,-38.933 U7.U2@35.37,-38.51
  L10(SIG) w0.103: v1(21.541,-43.101) 22.067,-42.575 30.46,-42.575 31.02,-42.015 31.057,-41.978 ; 31.058,-41.978 cw(c31.15,-42.071) 31.243,-41.978 31.429,-42.165 ccw(c31.522,-42.071) 31.615,-42.165 33.136,-40.644 ccw(c33.043,-40.551) 33.136,-40.458 ccw(c33.043,-40.551) 32.95,-40.458 31.616,-41.792 cw(c31.522,-41.699) 31.429,-41.792 cw(c31.522,-41.699) 31.429,-41.606 32.856,-40.179 32.893,-40.142 32.893,-39.028 v1(32.942,-38.979)
DDR_DQ23: U7.U3 U15.H7 | length 22.2
  L1(SIG) w0.103: v1(20.754,-43.088) 20.754,-43.084 21.133,-42.705 U15.H7@21.133,-42.701 ; v1(35.786,-38.904) 35.786,-38.899 36.17,-38.515 U7.U3@36.17,-38.51
  L10(SIG) w0.103: v1(20.754,-43.088) 21.977,-44.311 23.336,-44.311 23.55,-44.098 23.55,-43.746 23.839,-43.457 24.364,-43.457 24.686,-43.135 32.306,-43.135 33.841,-41.6 33.841,-40.838 33.878,-40.802 cw(c34.01,-40.934) 34.142,-40.802 34.406,-41.065 ccw(c34.538,-40.934) 34.67,-41.066 35.258,-40.477 ccw(c35.126,-40.345) 35.258,-40.213 ccw(c35.126,-40.345) 34.994,-40.213 34.67,-40.538 cw(c34.538,-40.406) 34.406,-40.538 cw(c34.538,-40.406) 34.406,-40.274 35.583,-39.097 35.619,-39.06 35.776,-38.904 v1(35.786,-38.904)
DDR_DQ24: U7.V1 U15.A2 | length 17.8
  L1(SIG) w0.103: U15.A2@26.733,-38.701 27.711,-37.723 27.89,-37.723 27.942,-37.723 ccw(c27.942,-37.571) 28.094,-37.571 28.094,-36.661 cw(c28.245,-36.661) 28.245,-36.509 29.396,-36.509 cw(c29.396,-36.661) 29.503,-36.553 29.98,-37.03 cw(c29.872,-37.137) 29.98,-37.244 cw(c29.872,-37.137) 29.765,-37.244 29.377,-36.856 ccw(c29.27,-36.964) 29.27,-36.812 28.549,-36.812 ccw(c28.549,-36.964) 28.397,-36.964 ccw(c28.549,-36.964) 28.549,-37.116 29.145,-37.116 cw(c29.145,-37.267) 29.251,-37.16 29.551,-37.459 cw(c29.443,-37.566) 29.551,-37.673 cw(c29.443,-37.566) 29.336,-37.673 29.126,-37.463 ccw(c29.019,-37.571) 29.019,-37.419 28.549,-37.419 ccw(c28.549,-37.571) 28.397,-37.571 ccw(c28.549,-37.571) 28.549,-37.723 28.893,-37.723 cw(c28.893,-37.874) 29,-37.767 29.229,-37.995 29.265,-38.032 29.694,-38.032 30.158,-38.496 30.536,-38.496 cw(c30.536,-38.747) 30.788,-38.747 30.788,-38.964 ccw(c31.039,-38.964) 31.039,-39.216 ccw(c31.039,-38.964) 31.291,-38.964 31.291,-38.887 cw(c31.543,-38.887) 31.721,-38.709 31.846,-38.835 32.377,-39.365 34.514,-39.365 U7.V1@34.57,-39.31
DDR_DQ25: U7.Y3 U15.C8 | length 18.6
  L1(SIG) w0.103: U15.C8@25.133,-43.501 25.529,-43.105 25.529,-42.365 26.016,-41.878 26.162,-41.878 26.214,-41.878 ccw(c26.214,-41.756) 26.335,-41.756 cw(c26.457,-41.756) 26.457,-41.635 29.128,-41.635 cw(c29.128,-41.756) 29.249,-41.756 cw(c29.128,-41.756) 29.128,-41.878 26.701,-41.878 ccw(c26.701,-42) 26.579,-42 ccw(c26.701,-42) 26.701,-42.121 29.371,-42.121 ccw(c29.371,-42) 29.493,-42 cw(c29.615,-42) 29.615,-41.878 29.666,-41.878 35.491,-41.878 36.131,-41.239 36.131,-40.949 U7.Y3@36.17,-40.91
DDR_DQ26: U7.W1 U15.A3 | length 18.1
  L1(SIG) w0.103: U15.A3@26.733,-39.501 26.924,-39.501 27.242,-39.501 27.279,-39.538 27.279,-40.329 27.582,-40.329 27.582,-38.876 27.886,-38.876 27.886,-40.329 28.189,-40.329 28.189,-38.585 28.492,-38.585 28.492,-40.329 28.796,-40.329 28.796,-38.834 29.099,-38.834 29.099,-40.276 29.403,-40.276 29.403,-40.11 30.633,-40.11 U7.W1@34.57,-40.11
DDR_DQ27: U7.Y4 U15.B8 | length 18.1
  L1(SIG) w0.103: U15.B8@25.933,-43.501 26.338,-43.096 27.443,-43.096 27.764,-43.417 27.764,-44.024 28.194,-44.454 28.956,-44.454 29.008,-44.454 ccw(c29.008,-44.302) 29.159,-44.302 cw(c29.311,-44.302) 29.276,-44.154 29.311,-44.146 ccw(c29.275,-43.998) 29.382,-44.106 30.5,-42.988 cw(c30.607,-43.096) 30.715,-42.988 cw(c30.607,-43.096) 30.715,-43.203 29.57,-44.347 ccw(c29.678,-44.454) 29.57,-44.562 ccw(c29.678,-44.454) 29.785,-44.562 30.904,-43.443 cw(c31.011,-43.551) 31.011,-43.399 31.343,-43.399 ccw(c31.343,-43.247) 31.495,-43.247 cw(c31.647,-43.247) 31.647,-43.096 31.698,-43.096 35.67,-43.096 36.97,-41.795 U7.Y4@36.97,-40.91
DDR_DQ28: U7.Y2 U15.C3 | length 18.2
  L1(SIG) w0.103: U15.C3@25.203,-39.571 U15.C3@25.133,-39.501 24.765,-39.869 24.765,-40.359 24.939,-40.533 25.146,-40.533 25.279,-40.533 25.279,-39.887 25.582,-39.887 25.582,-40.706 25.886,-40.706 25.886,-40.225 26.189,-40.225 26.189,-40.706 26.492,-40.706 26.492,-40.183 26.796,-40.183 26.796,-40.706 27.099,-40.706 27.099,-40.533 27.151,-40.533 30.521,-40.533 30.573,-40.533 30.573,-40.313 30.876,-40.313 30.876,-40.541 31.18,-40.541 31.18,-40.313 31.483,-40.313 31.483,-40.541 31.787,-40.541 31.787,-40.313 32.09,-40.313 32.09,-40.541 32.394,-40.541 32.394,-40.313 32.697,-40.313 32.697,-40.541 33,-40.541 33,-40.313 33.304,-40.313 33.304,-40.541 33.607,-40.541 33.607,-40.348 33.911,-40.348 33.911,-40.533 34.068,-40.533 34.987,-40.533 35.363,-40.91 U7.Y2@35.37,-40.91
DDR_DQ29: U7.W3 U15.D7 | length 17.6
  L1(SIG) w0.103: U15.D7@24.333,-42.701 24.333,-42.666 24.608,-42.391 24.645,-42.354 cw(c24.709,-42.42) 24.774,-42.355 ccw(c24.839,-42.29) 24.903,-42.355 25.58,-41.679 ccw(c25.515,-41.614) 25.58,-41.549 ccw(c25.515,-41.614) 25.45,-41.549 24.904,-42.095 cw(c24.839,-42.031) 24.774,-42.095 cw(c24.839,-42.031) 24.774,-41.966 25.474,-41.266 cw(c25.539,-41.331) 25.539,-41.239 25.621,-41.239 cw(c25.621,-41.331) 25.713,-41.331 ccw(c25.805,-41.331) 25.805,-41.422 25.856,-41.422 25.924,-41.355 31.571,-41.355 31.639,-41.422 31.69,-41.422 cw(c31.69,-41.514) 31.782,-41.514 ccw(c31.874,-41.514) 31.874,-41.606 ccw(c31.874,-41.514) 31.965,-41.514 cw(c32.057,-41.514) 32.057,-41.422 cw(c32.057,-41.514) 32.149,-41.514 ccw(c32.24,-41.514) 32.24,-41.606 ccw(c32.24,-41.514) 32.332,-41.514 cw(c32.424,-41.514) 32.424,-41.422 cw(c32.424,-41.514) 32.516,-41.514 ccw(c32.607,-41.514) 32.607,-41.606 ccw(c32.607,-41.514) 32.699,-41.514 cw(c32.791,-41.514) 32.791,-41.422 cw(c32.791,-41.514) 32.882,-41.514 ccw(c32.974,-41.514) 32.974,-41.606 ccw(c32.974,-41.514) 33.066,-41.514 cw(c33.158,-41.514) 33.158,-41.422 cw(c33.158,-41.514) 33.249,-41.514 ccw(c33.341,-41.514) 33.341,-41.606 ccw(c33.341,-41.514) 33.433,-41.514 cw(c33.524,-41.514) 33.524,-41.422 cw(c33.524,-41.514) 33.616,-41.514 ccw(c33.708,-41.514) 33.708,-41.606 33.891,-41.606 ccw(c33.891,-41.514) 33.983,-41.514 ccw(c33.891,-41.514) 33.891,-41.422 cw(c33.891,-41.331) 33.8,-41.331 cw(c33.891,-41.331) 33.891,-41.239 34.075,-41.239 cw(c34.075,-41.331) 34.166,-41.331 ccw(c34.258,-41.331) 34.258,-41.422 34.798,-41.422 35.425,-41.422 35.793,-41.054 35.793,-40.486 U7.W3@36.17,-40.11
DDR_DQ30: U7.V2 U15.C2 | length 18.8
  L1(SIG) w0.103: 24.539,-37.115 24.257,-36.834 23.749,-36.834 23.622,-36.707 23.622,-36.326 23.749,-36.199 25.4,-36.199 25.546,-36.345 25.546,-38.879 25.781,-39.114 27.057,-39.114 27.813,-38.358 29.083,-38.358 30.412,-39.686 31.004,-39.686 31.031,-39.713 34.967,-39.713 U7.V2@35.37,-39.31 ; 24.558,-37.115 24.558,-37.394 24.72,-37.557 24.72,-38.287 U15.C2@25.133,-38.701
DDR_DQ31: U7.V3 U15.A7 | length 19
  L1(SIG) w0.103: U15.A7@26.733,-42.701 26.803,-42.63 26.971,-42.63 26.977,-42.624 27.841,-42.624 27.9,-42.565 27.952,-42.565 cw(c27.952,-42.717) 28.104,-42.717 28.104,-43.021 ccw(c28.255,-43.021) 28.255,-43.172 29.642,-43.172 ccw(c29.642,-43.021) 29.793,-43.021 ccw(c29.642,-43.021) 29.642,-42.869 28.559,-42.869 cw(c28.559,-42.717) 28.407,-42.717 cw(c28.559,-42.717) 28.559,-42.565 29.845,-42.565 30.226,-42.565 30.278,-42.565 ccw(c30.278,-42.414) 30.429,-42.414 30.429,-42.396 cw(c30.581,-42.396) 30.581,-42.244 cw(c30.581,-42.396) 30.733,-42.396 30.733,-42.473 ccw(c30.885,-42.473) 30.885,-42.624 ccw(c30.885,-42.473) 31.036,-42.473 31.036,-42.396 cw(c31.188,-42.396) 31.188,-42.244 cw(c31.188,-42.396) 31.34,-42.396 31.34,-42.473 ccw(c31.491,-42.473) 31.491,-42.624 ccw(c31.491,-42.473) 31.643,-42.473 31.643,-42.396 cw(c31.795,-42.396) 31.795,-42.244 cw(c31.795,-42.396) 31.947,-42.396 31.947,-42.473 ccw(c32.098,-42.473) 32.098,-42.624 ccw(c32.098,-42.473) 32.25,-42.473 32.25,-42.396 cw(c32.402,-42.396) 32.402,-42.244 cw(c32.402,-42.396) 32.553,-42.396 32.553,-42.473 ccw(c32.705,-42.473) 32.705,-42.624 ccw(c32.705,-42.473) 32.857,-42.473 32.857,-42.459 cw(c33.008,-42.459) 33.008,-42.307 cw(c33.008,-42.459) 33.16,-42.459 33.16,-42.473 ccw(c33.312,-42.473) 33.312,-42.624 ccw(c33.312,-42.473) 33.464,-42.473 33.464,-42.414 cw(c33.615,-42.414) 33.615,-42.262 cw(c33.615,-42.414) 33.767,-42.414 ccw(c33.919,-42.414) 33.919,-42.565 34.182,-42.565 35.572,-42.565 35.633,-42.505 35.822,-42.316 35.822,-42.16 36.547,-41.436 36.547,-39.686 U7.V3@36.17,-39.31
DDR_DQS0_N: U7.B2 U14.B7 | length 13.8
  L1(SIG) w0.069: U14.B7@25.679,-26.039 25.57,-26.039 25.447,-25.916 25.407,-25.875 25.407,-25.789 25.657,-25.538 25.907,-25.288 25.933,-25.288 26.187,-25.542 26.441,-25.542 26.695,-25.288 26.949,-25.288 27.203,-25.542 27.457,-25.542 27.711,-25.288 28.437,-25.288 28.881,-25.732 29.72,-26.572 29.822,-26.674 30.035,-26.674 ccw(c30.035,-26.394) 30.315,-26.394 30.315,-26.256 cw(c30.399,-26.256) 30.399,-26.171 cw(c30.399,-26.256) 30.483,-26.256 30.483,-26.562 ccw(c30.763,-26.562) 30.763,-26.842 ccw(c30.763,-26.562) 31.043,-26.562 31.043,-26.256 cw(c31.128,-26.256) 31.128,-26.171 cw(c31.128,-26.256) 31.212,-26.256 31.212,-26.394 ccw(c31.492,-26.394) 31.492,-26.674 31.999,-26.674 32.033,-26.674 32.287,-26.928 32.541,-26.928 32.795,-26.674 33.401,-26.674 33.607,-26.879 34.158,-26.879 35,-26.879 U7.B2@35.37,-26.51
DDR_DQS0_P: U7.C2 U14.C7 | length 14.9
  L1(SIG) w0.069: U14.C7@24.879,-26.039 24.988,-26.039 25.181,-25.845 25.181,-25.737 25.826,-25.092 26.014,-25.092 ; 26.014,-25.093 26.613,-25.093 ; 26.614,-25.092 28.518,-25.092 29.72,-26.295 29.903,-26.478 30.035,-26.478 ccw(c30.035,-26.394) 30.119,-26.394 30.119,-26.256 cw(c30.399,-26.256) 30.399,-25.976 cw(c30.399,-26.256) 30.679,-26.256 30.679,-26.562 ccw(c30.763,-26.562) 30.763,-26.647 ccw(c30.763,-26.562) 30.848,-26.562 30.848,-26.256 cw(c31.128,-26.256) 31.128,-25.976 cw(c31.128,-26.256) 31.408,-26.256 31.408,-26.394 ccw(c31.492,-26.394) 31.492,-26.478 31.999,-26.478 33.343,-26.478 33.67,-26.15 35.519,-26.15 35.729,-26.361 35.729,-26.658 35.406,-26.982 35.406,-27.273 U7.C2@35.37,-27.31
DDR_DQS1_N: U7.F2 U14.G3 | length 27.2
  L1(SIG) w0.069: U14.G3@21.679,-22.839 v1(22.083,-22.435) ; v1(35.05,-30.062) 35.05,-30.046 35.37,-29.726 U7.F2@35.37,-29.71
  L10(SIG) w0.069: v1(22.083,-22.435) 22.119,-22.471 22.411,-22.471 22.749,-22.809 25.439,-22.809 25.558,-22.809 cw(c25.527,-22.903) 25.597,-22.833 25.664,-22.899 ccw(c25.872,-22.691) 25.872,-22.986 26.388,-22.986 ccw(c26.388,-22.691) 26.51,-22.959 26.575,-22.93 cw(c26.616,-23.02) 26.616,-22.921 27.099,-22.921 cw(c27.099,-23.02) 27.169,-22.949 27.188,-22.968 ; 27.188,-22.968 ccw(c27.396,-22.76) 27.396,-23.055 27.686,-23.055 cw(c27.686,-23.154) 27.756,-23.083 27.945,-23.272 ccw(c28.153,-23.063) 28.362,-22.855 28.214,-22.707 28.139,-22.632 cw(c28.21,-22.562) 28.281,-22.492 28.503,-22.715 ccw(c28.711,-22.506) 28.92,-22.297 28.385,-21.762 ccw(c28.176,-21.971) 28.176,-21.676 27.886,-21.676 cw(c27.886,-21.576) 27.816,-21.647 27.798,-21.628 ccw(c27.589,-21.837) 27.589,-21.542 27.401,-21.542 cw(c27.401,-21.443) 27.401,-21.343 27.752,-21.343 cw(c27.752,-21.443) 27.822,-21.372 27.841,-21.391 ccw(c28.05,-21.182) 28.05,-21.477 28.34,-21.477 cw(c28.34,-21.576) 28.41,-21.506 29.339,-22.436 cw(c29.269,-22.506) 29.339,-22.576 28.502,-23.413 ccw(c28.711,-23.621) 28.5,-23.827 ccw(c28.711,-23.621) 28.502,-23.829 28.503,-23.83 28.596,-23.923 29.11,-24.437 29.11,-27.362 31.59,-29.842 34.863,-29.842 35.05,-30.028 v1(35.05,-30.062)
DDR_DQS1_P: U7.G2 U14.F3 | length 27.2
  L1(SIG) w0.069: U14.F3@22.479,-22.839 v1(22.883,-22.435) ; U7.G2@35.406,-30.538 35.406,-30.487 35.731,-30.162 v1(35.744,-30.162)
  L10(SIG) w0.069: v1(22.883,-22.435) 22.933,-22.435 23.111,-22.613 25.439,-22.613 25.571,-22.613 cw(c25.571,-22.711) 25.594,-22.616 cw(c25.527,-22.903) 25.736,-22.695 25.802,-22.761 ccw(c25.872,-22.691) 25.872,-22.79 26.388,-22.79 ccw(c26.388,-22.691) 26.429,-22.781 26.495,-22.751 cw(c26.616,-23.02) 26.616,-22.725 27.099,-22.725 cw(c27.099,-23.02) 27.307,-22.811 27.326,-22.83 ccw(c27.396,-22.76) 27.396,-22.859 27.686,-22.859 cw(c27.686,-23.154) 27.894,-22.945 28.083,-23.134 ccw(c28.153,-23.063) 28.224,-22.993 28.002,-22.772 cw(c28.21,-22.562) 28.385,-22.325 28.39,-22.325 28.493,-22.428 28.641,-22.576 ccw(c28.711,-22.506) 28.782,-22.436 28.246,-21.9 ccw(c28.176,-21.971) 28.176,-21.871 27.886,-21.871 cw(c27.886,-21.576) 27.678,-21.785 27.659,-21.767 ccw(c27.589,-21.837) 27.589,-21.738 27.401,-21.738 cw(c27.401,-21.443) 27.401,-21.148 27.752,-21.148 cw(c27.752,-21.443) 27.961,-21.234 27.979,-21.252 ccw(c28.05,-21.182) 28.05,-21.281 28.34,-21.281 cw(c28.34,-21.576) 28.548,-21.368 29.478,-22.297 cw(c29.269,-22.506) 29.478,-22.714 28.641,-23.551 ccw(c28.711,-23.621) 28.64,-23.691 ; 28.641,-23.691 28.734,-23.785 29.306,-24.356 29.306,-27.281 31.671,-29.646 35.141,-29.646 35.409,-29.914 35.409,-29.919 35.652,-30.162 v1(35.744,-30.162)